# Altium PCB led_stuff.PcbDoc
Units mil, origin at the board's own origin, x right, y up, seen from the top; angles counter-clockwise.
Board outline 800 x 1015 mil, 2 copper layers (Top Layer, Bottom Layer); 5 components, 4 nets, 11 pads, 0 vias.
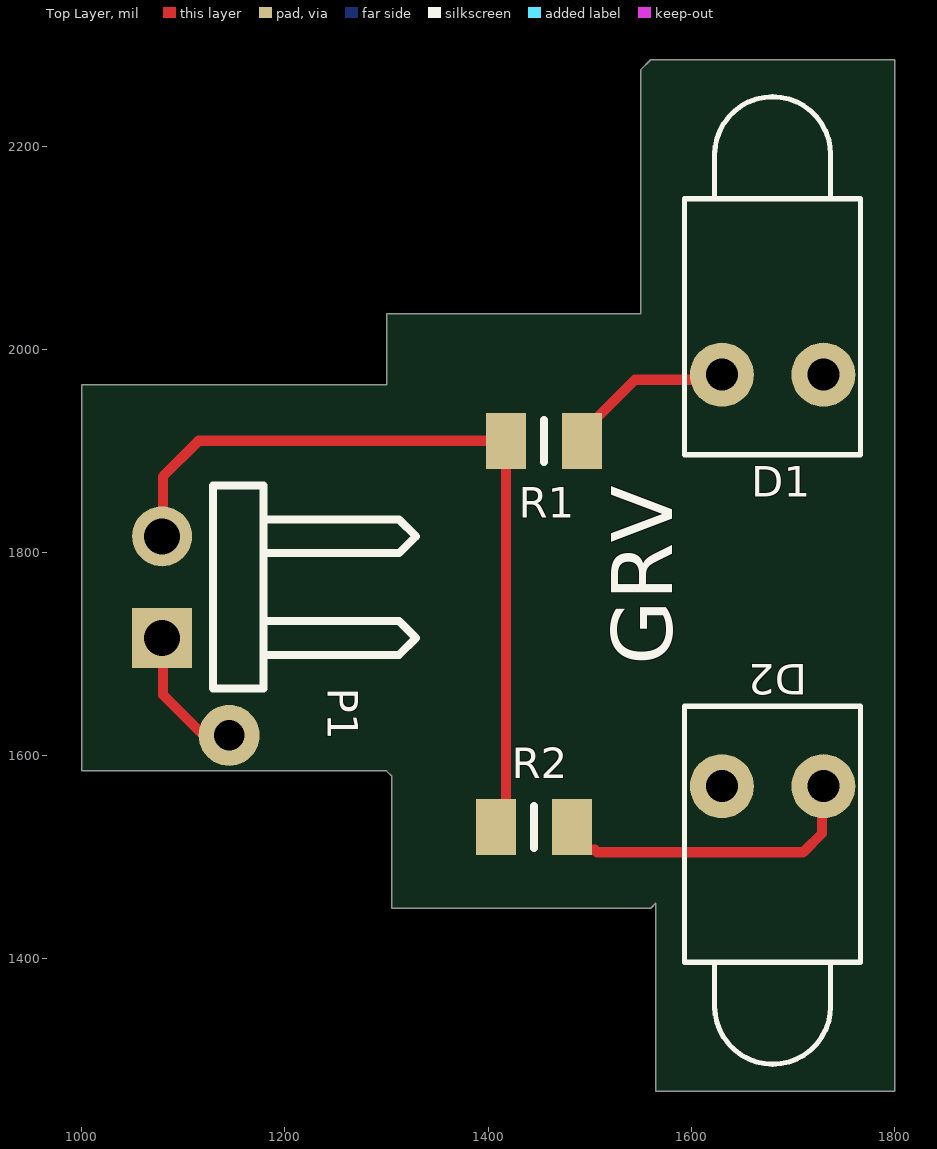
[diagram p0: Top Layer view]
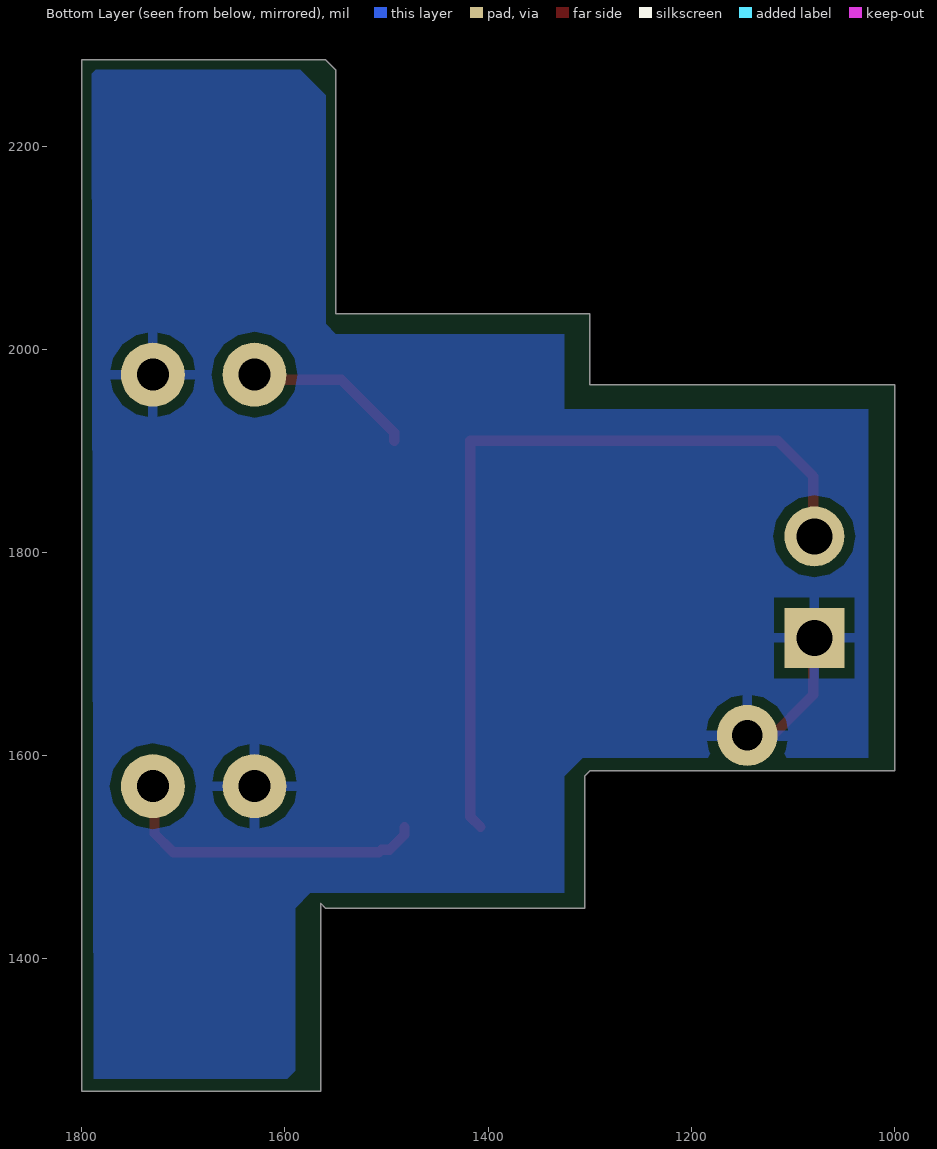
[diagram p1: Bottom Layer view, seen from below]

## Layer stack, top to bottom
Top Solder: solder mask 0.4, Solder Resist, Dk 3.5
Top Layer: signal copper 1.4
Dielectric 1: dielectric 12.6, FR-4, Dk 4.8
Bottom Layer: signal copper 1.4
Bottom Solder: solder mask 0.4, Solder Resist, Dk 3.5

## Board outline
1000,1965 1300,1965 1300,2035 1550,2035 1550,2275 1560,2285 1800,2285 1800,1270 1565,1270 1565,1455 1560,1450 1305,1450 1305,1580 1300,1585 1000,1585

## Design rules (kind name [scope] priority, off if disabled: settings)
Clearance [All] p1: gap=10 ignorepadtopadclearanceinfootprint=FALSE except(0: Arc-Hole Track-Hole SMDPad-Hole THPad-Hole Via-Hole Fill-Hole Poly-Hole Region-Hole Text-Hole)
PolygonConnect [All] p1: connectstyle=Relief reliefconductorwidth=10 reliefentries=4 polygonreliefangle="90 Angle" airgapwidth=10
RoutingCorners [All] p1: cornerstyle=Round minsetback=100 maxsetback=100
RoutingVias [All] p1: holewidth=28 width=50 viastyle="Through Hole" minholewidth=28 minwidth=50 maxholewidth=28 maxwidth=50
SilkToSilkClearance [All] p1: silktosilkclearance=2
SilkToSolderMaskClearance [IsPad] p1: minsilkscreentomaskgap=0.1 clearancetoexposedcopper=TRUE
SolderMaskExpansion [All] p1: expansion=4 istentingtop=FALSE
Width [All] p1: maxlimit=10 minlimit=10 preferedwidth=10
27 further rules are at their usual default settings.

## Components (designator, comment, footprint, x,y, rotation, side; value= is the part's Value field where it differs from the comment)
D1 "LED1" LED-1 1680,1975 r90 top
D2 "LED1" LED-1 1680,1570 r270 top
P1 "Header 2H" HDR1X2H 1079,1716 r90 top
R1 "KTR10EZPF5103" RESC2012X65N 1455,1910 r180 top
R2 "KTR10EZPF5103" RESC2012X65N 1445,1530 r180 top

## Footprints (in the part's own frame and the unit in brackets; to place one, negate y for a bottom-side part, rotate by r counter-clockwise, add the part's x,y. Pads: shape width x height; smd on the part's side, far side on the other; paste and mask are expansions set on the pad)
HDR1X2H [mm] "Connector; Header; 2 Position; Right Angle"
  rect 1.5x1.5 hole 0.9: 1(0,0)
  round 1.5 hole 0.9: 2(2.54,0)
  silkscreen extent -1.27,-6.35 3.81,-1.27
LED-1 [mm] "LED; 2 Leads"
  round 1.6 hole 0.8: 1(0,1.27) 2(0,-1.27)
  silkscreen extent -2,-2.2 6.95,2.2
RESC2012X65N [mm]
  rect 1x1.4 smd: 1(-0.95,0) 2(0.95,0)
  silkscreen extent 0,-0.53 0,0.53, body extent -1,-0.62 1,0.62, height 0.65

## Part data
D1 D2: "Typical RED GaAs LED", LatestRevisionDate=08-Jul-2005, LatestRevisionNote="Mech Layer 1 removed.", PackageDescription="LED; 2 Leads", PackageReference=LED-1, Published=8-Jun-2000, Publisher="Altium Limited"
P1: "Header, 2-Pin, Right Angle", LatestRevisionDate=17-Jul-2002, LatestRevisionNote="Re-released for DXP Platform.", Publisher="Altium Limited"
R1 R2: "Thick Film Resistors - SMD 0805 510Kohm 1% High VoltageAEC-Q200", Manufacturer_Name="ROHM Semiconductor", Arrow Part Number=KTR10EZPF5103, Arrow Price/Stock=https://www.arrow.com/en/products/ktr10ezpf5103/rohm-semiconductor, Datasheet Link=http://rohmfs.rohm.com/en/products/databook/datasheet/passive/resistor/chip_resistor/ktr.pdf, Geometry.Height=0.65mm, Manufacturer_Part_Number=KTR10EZPF5103

## Free pads (board coordinates)
  round 60 hole 30 mask+4: 2(1145,1620)

## Nets (pads, with @x,y where several pads share a name; then routed paths per layer and width w, separated by ;. In a path a pad name is that pad's centre, name@x,y a point inside that pad or via, vN(x,y) a via of type N, cw(c..) or ccw(c..) an arc to the next point about the centre after c; other vN are vias at no path point)
+5: P1.2 R1.2 R2.2 | length 796.2
  Top Layer w10: P1.2@1080,1815 1080,1875 1115,1910 R1.2 1417.6,1540 R2.2
GND: D1.2 D2.2 P1.1 pad.2 | length 118.6
  Top Layer w10: P1.1@1080,1715 1080,1660 pad.2@1125,1615
NetD1_1: D1.1 R1.1 | length 169.1
  Top Layer w10: R1.1 1492.4,1917.87 1544.53,1970 1625,1970 D1.1
NetD2_1: D2.1 R2.1 | length 315.9
  Top Layer w10: R2.1 1482.4,1522.13 1497.09,1507.44 1504.96,1507.44 1507.4,1505 1710,1505 1728.5,1523.5 1728.5,1568.5 D2.1

## Polygon pours and split planes (outlines as drawn)
GND on Bottom Layer "GND_L02_P000" (solid, pour order 0): 1026,1941 1026,1598 1307,1598 1325,1580 1325,1465 1575,1465 1590,1450 1590,1290 1598,1282 1788,1282 1790,2275 1585,2275 1560,2250 1560,2025 1550,2015 1340,2015 1325,2015 1325,1941

## Silkscreen, mask and mechanical layers (free items; w line width, h text height)
Top Overlay:
  text "GRV" at 1581.06,1688.94 h60 r90